# Altium PCB TestProject.PcbDoc
Units mm, origin at the board's own origin, x right, y up, seen from the top; angles counter-clockwise.
Board outline 50.8 x 54.8 mm, 2 copper layers (Top Layer, Bottom Layer); 19 components, 18 nets, 49 pads, 15 vias.
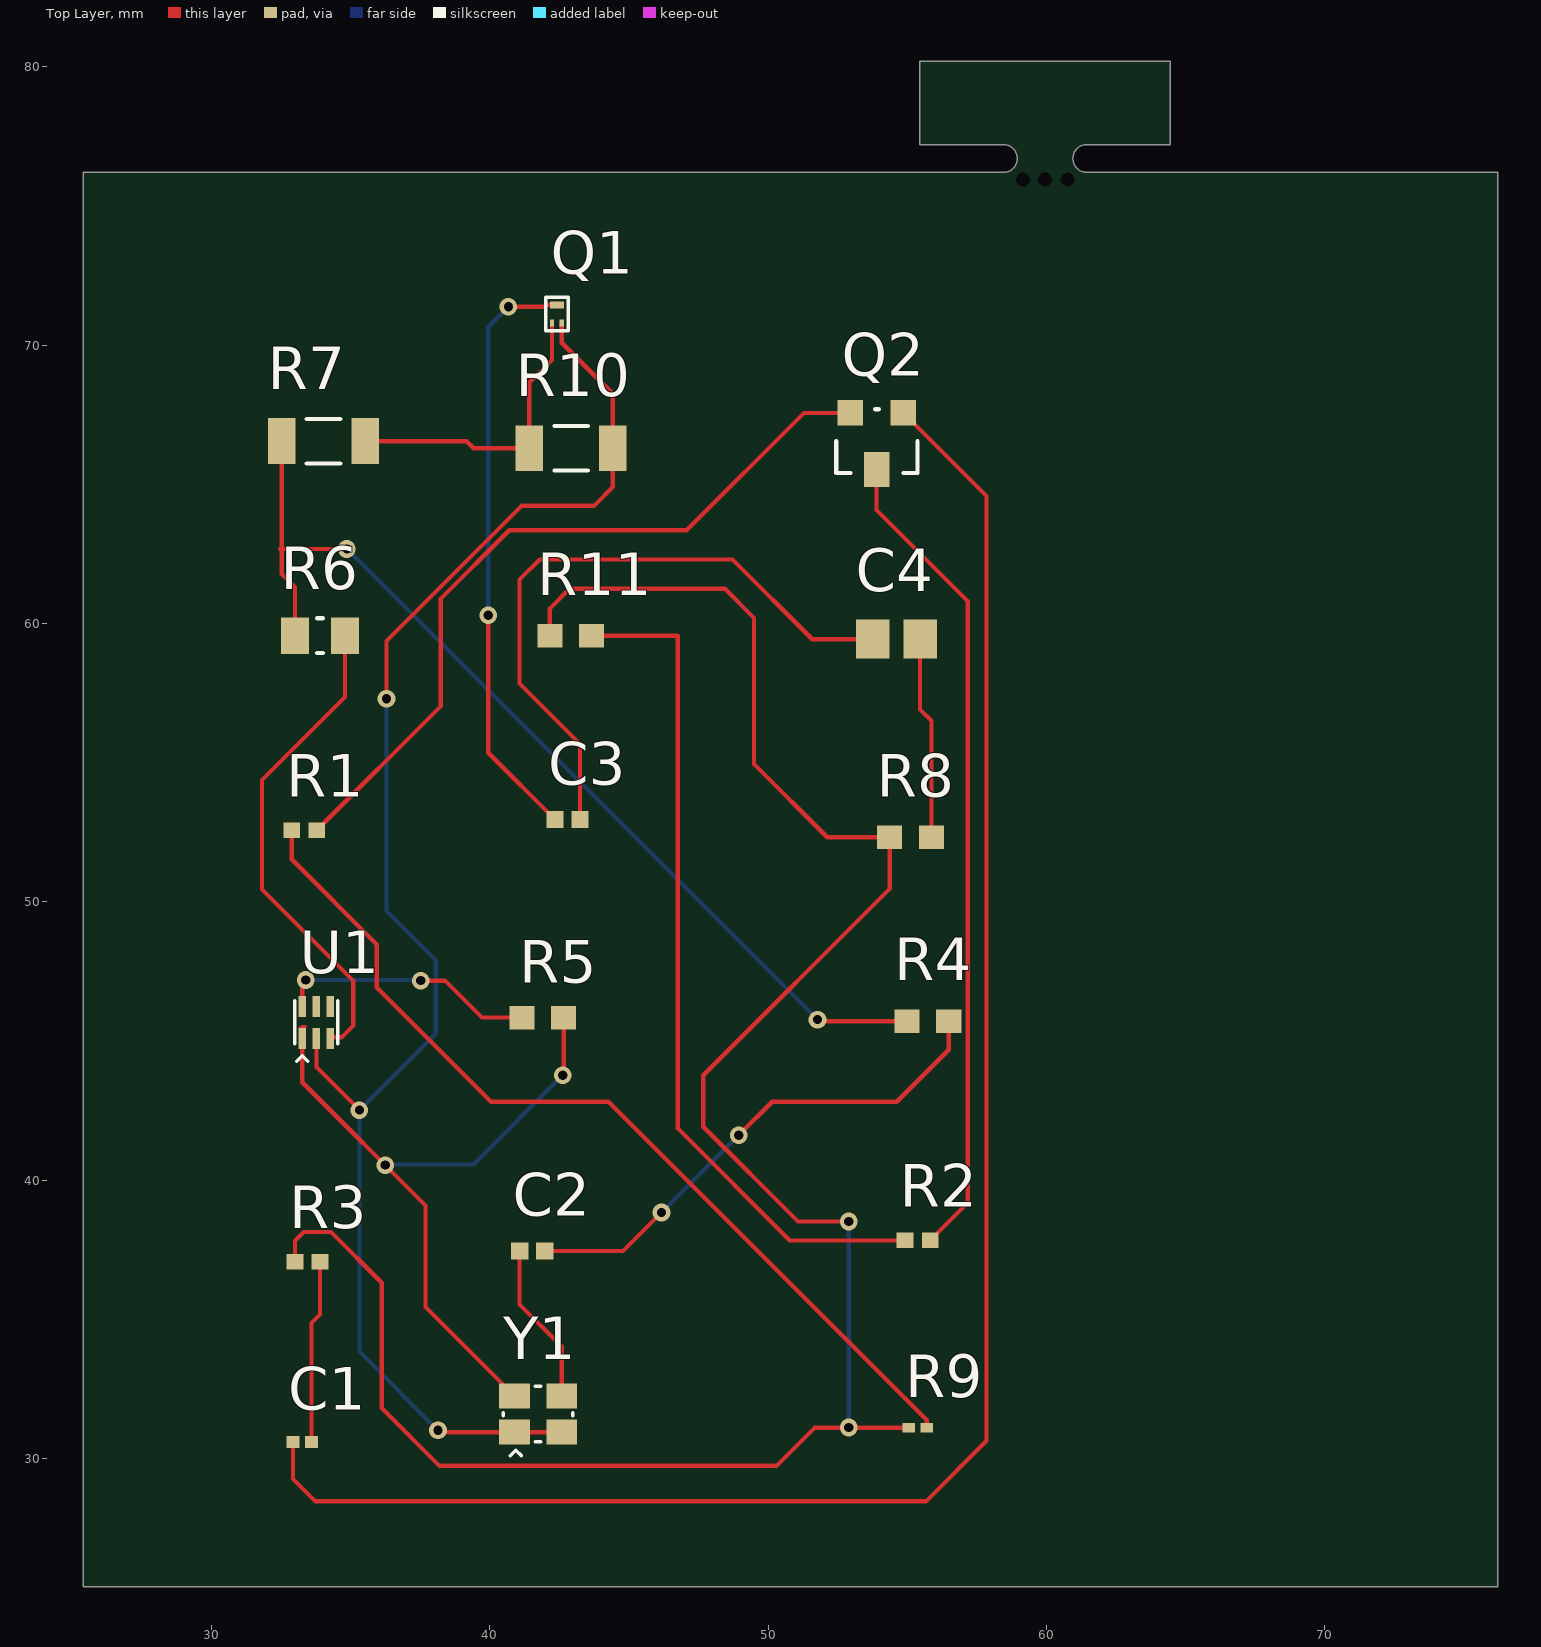
[diagram p0: Top Layer view]
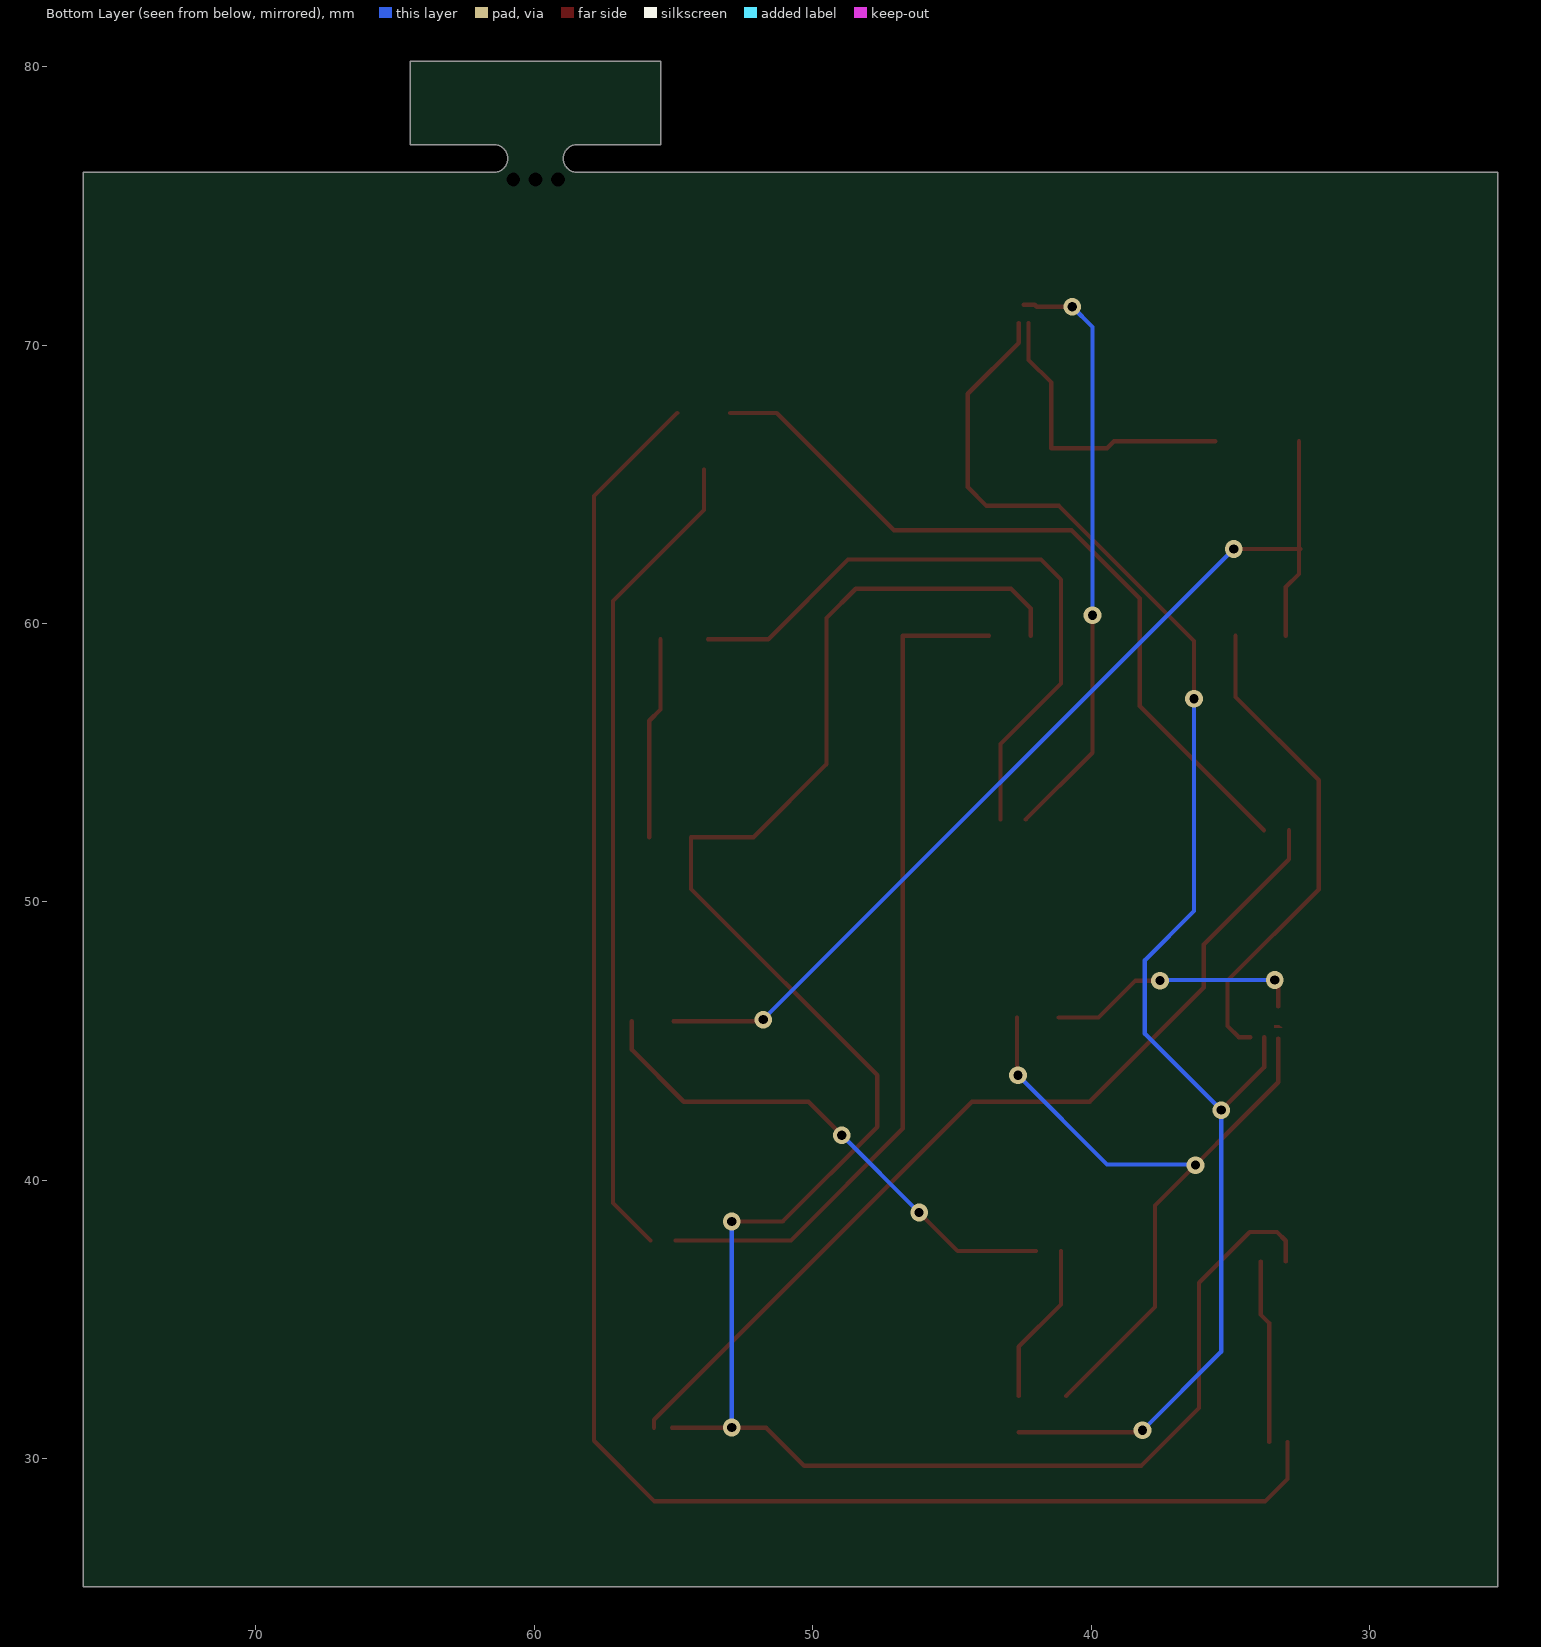
[diagram p1: Bottom Layer view, seen from below]

## Layer stack, top to bottom
Top Solder: solder mask 0.0102, Solder Resist, Dk 3.5
Top Layer: signal copper 0.0356
Dielectric 1: dielectric 0.32, FR-4, Dk 4.8
Bottom Layer: signal copper 0.0356
Bottom Solder: solder mask 0.0102, Solder Resist, Dk 3.5

## Board outline
25.4,25.4 25.4,76.2 58.45,76.2 ccw(c58.45,76.7) 58.45,77.2 55.45,77.2 55.45,80.2 64.45,80.2 64.45,77.2 61.45,77.2 ccw(c61.45,76.7) 61.45,76.2 76.2,76.2 76.2,25.4

## Design rules (kind name [scope] priority, off if disabled: settings)
AssemblyTestPointUsage [All] p1: valid=2
AssemblyTestpoint [All] p1: testpointundercomponent=TRUE minsize=1.016 maxsize=2.54 preferedsize=1.524 minholesize=0 maxholesize=1.016 preferedholesize=0.813 testpointgrid=2.54 usegrid=TRUE gridtolerance=0 allowsidetop=TRUE allowsidebottom=TRUE
Clearance LEDBoards [iscomponent] p1: gap=0.203 ignorepadtopadclearanceinfootprint=TRUE except(0.05: SMDPad-Hole)
Clearance Default [All] p2: gap=0.152 ignorepadtopadclearanceinfootprint=TRUE except(0.05: SMDPad-Region; 0.254: Fill-Fill Poly-Poly)
Clearance Power_Net [InNetClass('POWER')] p3: gap=0.203 ignorepadtopadclearanceinfootprint=TRUE
DiffPairsRouting Diff_Pairs_90_ohm [InDifferentialPairClass('DP90')] p1: maxlimit=0.203 minlimit=0.203 mostfreqgap=0.203 toplayer_minwidth=0.152 toplayer_maxwidth=0.152 toplayer_prefwidth=0.152 bottomlayer_minwidth=0.152 bottomlayer_maxwidth=0.152 bottomlayer_prefwidth=0.152 maxuncoupledlength=12.7
DiffPairsRouting Diff_Pairs_100_ohm [InDifferentialPairClass('DP100')] p2: maxlimit=0.178 minlimit=0.178 mostfreqgap=0.178 toplayer_minwidth=0.127 toplayer_maxwidth=0.127 toplayer_prefwidth=0.127 bottomlayer_minwidth=0.127 bottomlayer_maxwidth=0.127 bottomlayer_prefwidth=0.127 maxuncoupledlength=12.7
FabricationTestPointUsage [All] p1 off: valid=0 allowmultiple=FALSE
HoleSize [All] p1: absolutevalues=TRUE maxlimit=5 minlimit=0.025 maxpercent=80.000 minpercent=20.000
MatchedLengths "FLASH Matched Length" [InNetClass('FLASH')] p1: tolerance=5.08 checknetsindiffpair=FALSE checkdiffpairvsdiffpair=TRUE checkxsignals=TRUE checkothers=TRUE
MatchedLengths FSMC_Matched_Length_Group [InNetClass('FSMC_DA[0..15]')] p2: tolerance=2.54 checknetsindiffpair=FALSE checkdiffpairvsdiffpair=TRUE checkxsignals=TRUE checkothers=TRUE
MatchedLengths DP_100_match_within_pair [InDifferentialPairClass('DP100')] p3: tolerance=0.635 checknetsindiffpair=TRUE checkdiffpairvsdiffpair=FALSE checkxsignals=FALSE checkothers=FALSE
MatchedLengths DP_100_matched_length [InDifferentialPairClass('DP100')] p4: tolerance=0.635 checknetsindiffpair=FALSE checkdiffpairvsdiffpair=TRUE checkxsignals=TRUE checkothers=TRUE
MinimumSolderMaskSliver FinePitchIC [InComponentClass('FinePitchIC') vs InComponentClass('FinePitchIC')] p1: minsoldermaskwidth=0.076
MinimumSolderMaskSliver [All] p2: minsoldermaskwidth=0.1
NetAntennae [All] p1 off: netantennaetolerance=0
PlaneClearance [All] p1: clearance=0.305
PlaneConnect [All] p1: pad.planeconnectstyle=Relief pad.reliefexpansion=0.127 pad.reliefentries=4 pad.reliefconductorwidth=0.254 pad.reliefairgap=0.203 via.planeconnectstyle=Direct via.reliefexpansion=0.508 via.reliefentries=4 via.reliefconductorwidth=0.254 via.reliefairgap=0.254
PolygonConnect [InComponentClass('NoThermalRelief')] p1: thpad.connectstyle=Relief thpad.reliefconductorwidth=0.635 thpad.reliefentries=4 thpad.polygonreliefangle="90 Angle" thpad.airgapwidth=0.203 smdpad.connectstyle=Direct smdpad.reliefconductorwidth=0.254 smdpad.reliefentries=4 smdpad.polygonreliefangle="45 Angle" smdpad.airgapwidth=0.203 via.connectstyle=Direct via.reliefconductorwidth=0.254 via.reliefentries=4 via.polygonreliefangle="90 Angle" via.airgapwidth=0.254
PolygonConnect PolygonConnect_1 [All] p2: thpad.connectstyle=Relief thpad.reliefconductorwidth=0.635 thpad.reliefentries=4 thpad.polygonreliefangle="90 Angle" thpad.airgapwidth=0.203 smdpad.connectstyle=Relief smdpad.reliefconductorwidth=0.254 smdpad.reliefentries=4 smdpad.polygonreliefangle="45 Angle" smdpad.airgapwidth=0.203 via.connectstyle=Direct via.reliefconductorwidth=0.254 via.reliefentries=4 via.polygonreliefangle="90 Angle" via.airgapwidth=0.254
RoutingCorners [All] p1: cornerstyle=45-Degree minsetback=0.254 maxsetback=0.254
RoutingVias [All] p1: holewidth=0.33 width=0.61 viastyle="Through Hole" minholewidth=0.152 minwidth=0.457 maxholewidth=0.33 maxwidth=0.635
SilkToSilkClearance [All] p1: silktosilkclearance=0.013
SilkToSolderMaskClearance [IsPad] p1: minsilkscreentomaskgap=0.025 clearancetoexposedcopper=TRUE
SolderMaskExpansion [All] p1: expansion=0
Width Power_nets [InNetClass('Power')] p1: maxlimit=0.61 minlimit=0.254 preferedwidth=0.508
Width LEDtracks [InNetClass('LEDTrack')] p2: maxlimit=0.61 minlimit=0.254 preferedwidth=0.381
Width Default_Width [InNetClass('All Nets')] p3: maxlimit=0.254 minlimit=0.152 preferedwidth=0.203 checkconnectedcopper=TRUE
18 further rules are at their usual default settings.

## Components (designator, comment, footprint, x,y, rotation, side; value= is the part's Value field where it differs from the comment)
C1 "100pF" CAPC_0201(0603)_P33_N 33.274,30.607 r0 top
C2 "15pF" CAPC_0402(1005)_P55_N 41.529,37.465 r0 top
C3 "100pF" CAPC_0402(1005)_P55_N 42.799,52.959 r0 top
C4 "1.2pF" CAPC_0805(2012)_P95_N 54.61,59.436 r0 top
Q1 "CSD13381F4T" MOSFET3_TI_CSD13381F4T 42.418,71.12 r0 top
Q2 "MMBT3904-7-F" SOT-23 53.898,65.532 r0 top
R1 "10k2" RESC_0402(1005)_P4_N 33.343,52.578 r0 top
R2 "10k2" RESC_0402(1005)_P4_N 55.372,37.846 r0 top
R3 "10k2" RESC_0402(1005)_P4_N 33.459,37.084 r0 top
R4 "68k0" RESC_0603(1608)_P55_N 55.741,45.72 r0 top
R5 "0" RESC_0603(1608)_P55_N 41.91,45.847 r0 top
R6 "931k" RESC_0805(2012)_P6_N 33.909,59.563 r0 top
R7 "220k" RESC_1206(3216)_P6_N 34.036,66.548 r0 top
R8 "10R2" RESC_0603(1608)_P55_N 55.118,52.324 r0 top
R9 "10R2" RESC_0201(0603)_P28_N 55.372,31.115 r0 top
R10 "10k0" RESC_1206(3216)_P6_N 42.926,66.294 r0 top
R11 "360R" RESC_0603(1608)_P55_N 42.914,59.563 r0 top
U1 "TLV70028DSER" "TI DSE S-PWSON-N6" 33.775,45.675 r0 top
Y1 "SG-210STF 24.0000ML0" "Epson SG-210STF" 41.744,31.608 r0 top

## Footprints (in the part's own frame and the unit in brackets; to place one, negate y for a bottom-side part, rotate by r counter-clockwise, add the part's x,y. Pads: shape width x height; smd on the part's side, far side on the other; paste and mask are expansions set on the pad)
CAPC_0201(0603)_P33_N [mm]
  rect 0.46x0.42 smd: 1(-0.33,0) 2(0.33,0)
  body extent -0.75,-0.4 0.75,0.4, height 0.33
CAPC_0402(1005)_P55_N [mm]
  rect 0.62x0.62 smd: 1(-0.45,0) 2(0.45,0)
  body extent -0.95,-0.5 0.95,0.5, height 0.55
CAPC_0805(2012)_P95_N [mm]
  rect 1.2x1.4 smd: 1(-0.85,0) 2(0.85,0)
  body extent -1.7,-0.95 1.7,0.95, height 0.95
"Epson SG-210STF" [mm] "Crystal oscillator (SPXO)"
  rect 1.1x0.9 smd: 1(-0.85,-0.65) 2(0.85,-0.65) 3(0.85,0.65) 4(-0.85,0.65)
  silkscreen extent -1.25,-1.5 1.25,1, body extent -1.25,-1 1.25,1, height 0.8
MOSFET3_TI_CSD13381F4T [mm] "N-Channel 12V 2.1A (Ta) 500mW (Ta) Surface Mount 3-PICOSTAR"
  rect 0.15x0.25 smd paste+0 mask+0.05: 1(-0.175,-0.325) 2(0.175,-0.325)
  rect 0.5x0.25 smd paste+0 mask+0.05: 3(0,0.325)
  silkscreen extent -0.4,-0.6 0.4,0.6, body extent -0.3,-0.5 0.3,0.5, height 0.35
RESC_0201(0603)_P28_N [mm]
  rect 0.45x0.35 smd: 1(-0.325,0) 2(0.325,0)
  body extent -0.7,-0.35 0.7,0.35, height 0.28
RESC_0402(1005)_P4_N [mm]
  rect 0.6x0.55 smd: 1(-0.45,0) 2(0.45,0)
  body extent -0.9,-0.45 0.9,0.45, height 0.4
RESC_0603(1608)_P55_N [mm]
  rect 0.9x0.85 smd: 1(-0.75,0) 2(0.75,0)
  body extent -1.45,-0.7 1.45,0.7, height 0.55
RESC_0805(2012)_P6_N [mm]
  rect 1x1.3 smd: 1(-0.9,0) 2(0.9,0)
  silkscreen extent -0.1,-0.63 0.1,0.63, body extent -1.65,-0.9 1.65,0.9, height 0.6
RESC_1206(3216)_P6_N [mm]
  rect 1x1.65 smd: 1(-1.5,0) 2(1.5,0)
  silkscreen extent -0.6,-0.8 0.6,0.8, body extent -2.25,-1.1 2.25,1.1, height 0.6
SOT-23 [mil]
  rect 36x36 smd: 1(-36.98,80.01) 2(38.02,80.01)
  rect 36x50 smd: 3(0,-0.01)
  silkscreen extent -57,-5 58,85, body extent -59,-31 63,102, height 49
"TI DSE S-PWSON-N6" [mm] "TI WSON-6pin"
  rect 0.28x0.75 smd paste-0.015 mask+0.05: 1(-0.5,-0.575) 2(0,-0.575) 3(0.5,-0.575) 4(0.5,0.575) 5(0,0.575) 6(-0.5,0.575)
  Top Layer region: -0.64,-0.2 -0.54,-0.1 -0.36,-0.1 -0.36,-0.2
  silkscreen extent -0.77,-1.4 0.77,0.77, body extent -0.77,-0.77 0.77,0.77, height 0.8

## Part data
C1: library part 30030, Dielectric=NPO, Manufacturer=KEMET, Mfr Part Description="CAP CER 100pF ±5% 25V NPO 0201 (0603 Metric)", Mfr Part Number=C0201C101J3GACTU, Package_Case="0201 (0603 Metric)", Supplier Part Number=399-8925-1-ND, Temperature Range="-55C to +125C", Tolerance=±5%, Voltage_Rating=25V, Checked_Date="2018/04/12 14:14:25", Checked By=KristinPollock, ComponentLink1Description=Datasheet, ComponentLink1URL=https://search.kemet.com/component-edge/download/datasheet/C0201C101J3GACTU.pdf, ComponentLink2Description="Supplier Part Details", ComponentLink2URL=https://www.digikey.com/product-detail/en/kemet/C0201C101J3GACTU/399-8925-1-ND/3522442, Created_Date="2018/04/12 11:43:49", Created By=KristinPollock, ID=30030, LifeCycle=New, Part_Type=Capacitor, RoHS=Yes, Sub_Type=Ceramic, Supplier=Digi-Key, Updated_Date="2018/04/12 15:12:48", Updated By=KristinPollock
C2: library part 0402J150AX3, "Cap, Cer, 15pF, 5%, 25V, 0402, C0G", Alt_Mfr=Kemet, Alt_Part Number=C0402C150J3GACTU, Dielectric=C0G, Manufacturer=AVX, Mfr Part Number=04023A150JAT, Package_Case=0402, Temperature Range="-55C to +125C", Tolerance=5%, ValueSort=15, Voltage_Rating=25V, Checked_Date="2018-10-18 19:17:33", Checked By="DJH Script", Created_Date="2018-10-18 19:17:33", Created By="DJH Script", ID=0402J150AX3, LifeCycle=New, Part_Type=Capacitor, RoHS=Yes, Sub_Type=Ceramic
C3: library part 0402J101AX3, "Cap, Cer, 100pF, 5%, 25V, 0402, C0G", Alt_Mfr=Kemet, Alt_Part Number=C0402C101J3GACTU, Dielectric=C0G, Manufacturer=AVX, Mfr Part Number=04023A101JAT, Package_Case=0402, Temperature Range="-55C to +125C", Tolerance=5%, ValueSort=100, Voltage_Rating=25V, Checked_Date="2018-10-18 19:17:33", Checked By="DJH Script", Created_Date="2018-10-18 19:17:33", Created By="DJH Script", ID=0402J101AX3, LifeCycle=New, Part_Type=Capacitor, RoHS=Yes, Sub_Type=Ceramic
C4: library part 0805B129AX2, "Cap, Cer, 1.2pF, 0.1pF, 200V, 0805, C0G", Alt_Mfr=Kemet, Alt_Part Number=C0805C129B2GACTU, Dielectric=C0G, Manufacturer=AVX, Mfr Part Number=08052A1R2BAT, Package_Case=0805, Temperature Range="-55C to +125C", Tolerance=0.1pF, ValueSort=1.2, Voltage_Rating=200V, Checked_Date="2018-10-18 19:17:43", Checked By="DJH Script", Created_Date="2018-10-18 19:17:43", Created By="DJH Script", ID=0805B129AX2, LifeCycle=New, Part_Type=Capacitor, RoHS=Yes, Sub_Type=Ceramic
Q1: library part 30004, "MOSFET N-CH 12V 2.1A 3PICOSTAR", Current_Rating="2.1A (Ta)", Manufacturer="Texas Instruments", Package_Case=3-XFDFN, Supplier Part Number=296-37779-1-ND, Temperature Range="-55C to +150C (TJ)", Voltage_Rating=12V, Checked_Date="2018/03/05 11:42:27", Checked By="Kristin Pollock", Checked date=2017-09-28, ComponentLink1Description=Datasheet, ComponentLink1URL=http://www.ti.com/lit/ds/symlink/csd13381f4.pdf, ComponentLink2Description="Supplier Part Details", ComponentLink2URL=https://www.digikey.com/product-detail/en/CSD13381F4T/296-37779-1-ND, Created_Date="2018/03/05 11:40:06", Created By="Kristin Pollock", Created date=2017-07-20, ID=30004, LifeCycle=New, MFG=TI, Mfr Part Description="MOSFET N-CH 12V 2.1A 3PICOSTAR", Mfr Part Number=CSD13381F4T, MPN=CSD13381F4T, Part_Type=Discrete, RoHS=Yes, Sub_Type="FET N-CH", Supplier=Digi-Key, Supplier 1=Digi-Key, Supplier Part Number 1=296-37779-1-ND, Updated_Date="2018/03/05 11:53:56", Updated By="Kristin Pollock"
Q2: library part 30027, "NPN General Purpose Amplifier", Current_Rating=200mA, Manufacturer="Diodes Incorporated", Mfr Part Description="TRANS NPN 40V 0.2A SMD SOT23-3", Package_Case="TO-236-3, SC-59, SOT-23-3", Supplier Part Number=MMBT3904-FDICT-ND, Temperature Range="-55C to +150C (TJ)", Voltage_Rating=40V, Checked_Date="2018/04/19 15:36:23", Checked By=DaveHough, ComponentLink1Description=Datasheet, ComponentLink1URL=https://media.digikey.com/pdf/Data%20Sheets/Diodes%20PDFs/MMBT3904.pdf, ComponentLink2Description="Supplier Part Details", ComponentLink2URL=https://www.digikey.com/products/en?keywords=MMBT3904-FDICT-ND, Created_Date="2018/04/10 10:51:11", Created By=DaveHough, ID=30027, LifeCycle=New, MFG="Diodes Inc", Mfr Part Number=MMBT3904-7-F, MPN=MMBT3904-7-F, MTG=SMT, Part_Type=Discrete, RoHS=Yes, SPN=MMBT3904-FDICT-ND, SPR=Digikey, Sub_Type="BJT NPN", Supplier=Digi-Key, Updated_Date="2018/04/19 15:36:29", Updated By=DaveHough
R1 R2 R3: library part 0402E1022XBX, "Res 0402 1% 10k2 1/16W", Alt_Mfr=Yageo, Alt_Mfr2="Vishay Dale", Alt_Part Number=RC0402FR-0710K2L, Alt_Part Number2=CRCW040210K2FKED, Manufacturer=Panasonic, Mfr Part Number=ERJ2RKF1022X, Package_Case=0402, Power_Rating=1/16W, Temperature Range="-55C to +125C", Tolerance=1%, ValueSort=10200, Voltage_Rating=50V, Checked_Date="2018-10-18 18:51:45", Checked By="DJH Script", Created_Date="2018-10-18 18:51:45", Created By="DJH Script", ID=0402E1022XBX, LifeCycle=New, Part_Type=chipResistor, RoHS=Yes
R4: library part 0603E6802XCX, "Res 0603 1% 68k0 1/10W", Alt_Mfr=Yageo, Alt_Mfr2="Vishay Dale", Alt_Part Number=RC0603FR-0768KL, Alt_Part Number2=CRCW060368K0FKEA, Manufacturer=Panasonic, Mfr Part Number=ERJ3EKF6802V, Package_Case=0603, Power_Rating=1/10W, Temperature Range="-55C to +125C", Tolerance=1%, ValueSort=68000, Voltage_Rating=75V, Checked_Date="2018-10-18 18:51:45", Checked By="DJH Script", Created_Date="2018-10-18 18:51:45", Created By="DJH Script", ID=0603E6802XCX, LifeCycle=New, Part_Type=chipResistor, RoHS=Yes
R5: library part 30019, Manufacturer=Yageo, Mfr Part Description="RES 0 Ohm Jumper 1/10W 0603 (1608 Metric)", Mfr Part Number=RC0603JR-070RL, Package_Case="0603 (1608 Metric)", Power_Rating="0.1W, 1/10W", Supplier Part Number=311-0.0GRCT-ND, Temperature Range="-55C to +155C", Tolerance=Jumper, Checked_Date="2018/03/08 06:36:08", Checked By="Kristin Pollock", ComponentLink1Description=Datasheet, ComponentLink1URL=http://www.yageo.com/documents/recent/PYu-RC_Group_51_RoHS_L_8.pdf, ComponentLink2Description="Supplier Part Details", ComponentLink2URL=https://www.digikey.com/products/en?x=0&y=0&lang=en&site=us&keywords=311-0.0GRCT-ND, Created_Date="2018/03/08 06:30:19", Created By="Kristin Pollock", ID=30019, LifeCycle=New, Part_Type=Resistor, RoHS=Yes, Supplier=Digi-Key, Updated_Date="2018/04/12 16:03:06", Updated By=KristinPollock
R6: library part 0805E9313XDX, "Res 0805 1% 931k 1/8W", Alt_Mfr=Yageo, Alt_Mfr2="Vishay Dale", Alt_Part Number=RC0805FR-07931KL, Alt_Part Number2=CRCW0805931KFKEA, Manufacturer=Panasonic, Mfr Part Number=ERJ6ENF9313V, Package_Case=0805, Power_Rating=1/8W, Temperature Range="-55C to +125C", Tolerance=1%, ValueSort=931000, Voltage_Rating=100V, Checked_Date="2018-10-18 18:51:45", Checked By="DJH Script", Created_Date="2018-10-18 18:51:45", Created By="DJH Script", ID=0805E9313XDX, LifeCycle=New, Part_Type=chipResistor, RoHS=Yes
R7: library part 1206E2203XEX, "Res 1206 1% 220k 1/4W", Alt_Mfr=Yageo, Alt_Mfr2="Vishay Dale", Alt_Part Number=RC1206FR-07220KL, Alt_Part Number2=CRCW1206220KFKEA, Manufacturer=Panasonic, Mfr Part Number=ERJ8ENF2203V, Package_Case=1206, Power_Rating=1/4W, Temperature Range="-55C to +125C", Tolerance=1%, ValueSort=220000, Voltage_Rating=200V, Checked_Date="2018-10-18 18:51:45", Checked By="DJH Script", Created_Date="2018-10-18 18:51:45", Created By="DJH Script", ID=1206E2203XEX, LifeCycle=New, Part_Type=chipResistor, RoHS=Yes
R8: library part 0603E1029XCX, "Res 0603 1% 10R2 1/10W", Alt_Mfr=Yageo, Alt_Mfr2="Vishay Dale", Alt_Part Number=RC0603FR-0710R2L, Alt_Part Number2=CRCW060310R2FKEA, Manufacturer=Panasonic, Mfr Part Number=ERJ3EKF10R2V, Package_Case=0603, Power_Rating=1/10W, Temperature Range="-55C to +125C", Tolerance=1%, ValueSort=10.2, Voltage_Rating=75V, Checked_Date="2018-10-18 18:51:45", Checked By="DJH Script", Created_Date="2018-10-18 18:51:45", Created By="DJH Script", ID=0603E1029XCX, LifeCycle=New, Part_Type=chipResistor, RoHS=Yes
R9: library part 0201E1029XAX, "Res 0201 1% 10R2 1/20W", Alt_Mfr=Yageo, Alt_Mfr2="Vishay Dale", Alt_Part Number=RC0201FR-0710R2L, Alt_Part Number2=CRCW020110R2FKED, Manufacturer=Panasonic, Mfr Part Number=ERJ1GNF10R2C, Package_Case=0201, Power_Rating=1/20W, Temperature Range="-55C to +125C", Tolerance=1%, ValueSort=10.2, Voltage_Rating=25V, Checked_Date="2018-10-18 18:51:45", Checked By="DJH Script", Created_Date="2018-10-18 18:51:45", Created By="DJH Script", ID=0201E1029XAX, LifeCycle=New, Part_Type=chipResistor, RoHS=Yes
R10: library part 1206E1002XEX, "Res 1206 1% 10k0 1/4W", Alt_Mfr=Yageo, Alt_Mfr2="Vishay Dale", Alt_Part Number=RC1206FR-0710KL, Alt_Part Number2=CRCW120610K0FKEA, Manufacturer=Panasonic, Mfr Part Number=ERJ8ENF1002V, Package_Case=1206, Power_Rating=1/4W, Temperature Range="-55C to +125C", Tolerance=1%, ValueSort=10000, Voltage_Rating=200V, Checked_Date="2018-10-18 18:51:45", Checked By="DJH Script", Created_Date="2018-10-18 18:51:45", Created By="DJH Script", ID=1206E1002XEX, LifeCycle=New, Part_Type=chipResistor, RoHS=Yes
R11: library part 0603E3600XCX, "Res 0603 1% 360R 1/10W", Alt_Mfr=Yageo, Alt_Mfr2="Vishay Dale", Alt_Part Number=RC0603FR-07360RL, Alt_Part Number2=CRCW0603360RFKEA, Manufacturer=Panasonic, Mfr Part Number=ERJ3EKF3600V, Package_Case=0603, Power_Rating=1/10W, Temperature Range="-55C to +125C", Tolerance=1%, ValueSort=360, Voltage_Rating=75V, Checked_Date="2018-10-18 18:51:45", Checked By="DJH Script", Created_Date="2018-10-18 18:51:45", Created By="DJH Script", ID=0603E3600XCX, LifeCycle=New, Part_Type=chipResistor, RoHS=Yes
U1: library part 30016, "IC REG LDO 2.8V 0.2A 6WSON", Manufacturer="Texas Instruments", Mfr Part Description="IC REG LINEAR 2.8V 200MA 6WSON", Package_Case=6-WFDFN, Supplier Part Number=296-25291-1-ND, Temperature Range="-40C to +125C", Checked_Date="2018/03/05 11:52:06", Checked By="Kristin Pollock", Checked date=2017-09-26, ComponentLink1Description=Datasheet, ComponentLink1URL=http://www.ti.com/lit/ds/slvsa00e/slvsa00e.pdf, ComponentLink2Description="Supplier Part Details", ComponentLink2URL=https://www.digikey.com/product-detail/en/TLV70028DSER/296-25291-1-ND, Created_Date="2018/03/05 11:40:06", Created By="Kristin Pollock", Created date=2017-08-30, ID=30016, LifeCycle=New, MFG=TI, Mfr Part Number=TLV70028DSER, MPN=TLV70028DSER, Part_Type=IC, RoHS=Yes, Sub_Type="REG LINEAR", Supplier=Digi-Key, Supplier 1=Digi-Key, Supplier Part Number 1=296-25291-1-ND, Updated_Date="2018/03/05 11:52:54", Updated By="Kristin Pollock"
Y1: library part 30010, "OSC XO 24.000MHZ CMOS SMD", Current_Rating=2.2mA, Manufacturer=EPSON, Package_Case="4-SMD, No Lead", Supplier Part Number=SER4078CT-ND, Temperature Range="-40C to +85C", Voltage_Rating="1.6 V ~ 3.6 V", Checked_Date="2018/03/05 11:44:37", Checked By="Kristin Pollock", Checked date=2017-09-26, ComponentLink1Description=Datasheet, ComponentLink1URL=https://support.epson.biz/td/api/doc_check.php?dl=brief_SG-210STF_en.pdf, ComponentLink2Description="Supplier Part Details", ComponentLink2URL=https://www.digikey.com/product-detail/en/SG-210STF%2024.0000ML0/SER4078CT-ND, Created_Date="2018/03/05 11:40:06", Created By="Kristin Pollock", Created date=2017-08-13, ID=30010, LifeCycle=New, MFG=Abracon, Mfr Part Description="OSC XO 24.000MHZ CMOS SMD", Mfr Part Number="SG-210STF 24.0000ML0", MPN="SG-210STF 24.0000ML0", Part_Type=OSC, RoHS=Yes, Supplier=Digi-Key, Supplier 1=Digi-Key, Supplier Part Number 1=SER4078CT-ND, Updated_Date="2018/03/05 11:53:19", Updated By="Kristin Pollock"

## Free pads (board coordinates)
  oval 0x0.2 hole 0.5 unplated: 6(59.95,75.95) 7(59.15,75.95) 8(60.75,75.95)

## Via types
v1: diameter 0.635, hole 0.33, Top Layer to Bottom Layer, 15 vias

## Nets (pads, with @x,y where several pads share a name; then routed paths per layer and width w, separated by ;. In a path a pad name is that pad's centre, name@x,y a point inside that pad or via, vN(x,y) a via of type N, cw(c..) or ccw(c..) an arc to the next point about the centre after c; other vN are vias at no path point)
GND: Q1.2 R10.2 U1.2 Y1.1 Y1.2 | length 56.2
  Top Layer w0.152: U1.2@33.782,45.145 33.782,44.068 v1(35.325,42.525) ; v1(36.3,57.3) 36.3,59.375 41.15,64.225 43.75,64.225 44.426,64.901 R10.2 44.426,68.249 42.593,70.082 Q1.2 ; v1(38.15,31.025) 38.217,30.958 Y1.1 Y1.2
  Bottom Layer w0.152: v1(36.3,57.3) 36.3,49.675 38.071,47.904 38.071,45.271 v1(35.325,42.525) 35.325,33.85 v1(38.15,31.025)
NetC1_1: C1.1 Q2.2 | length 65.6
  Top Layer w0.152: C1.1 32.944,29.281 33.75,28.475 55.675,28.475 57.85,30.65 57.85,64.578 Q2.2
NetC1_2: C1.2 R3.2 | length 6.6
  Top Layer w0.152: C1.2 33.604,34.879 33.909,35.184 R3.2
NetC2_1: C2.1 Y1.3 | length 5.8
  Top Layer w0.152: C2.1 41.079,35.546 42.594,34.031 Y1.3
NetC2_2: C2.2 R4.2 | length 18.5
  Top Layer w0.152: C2.2 44.79,37.465 v1(46.175,38.85) ; v1(48.95,41.625) 50.15,42.825 54.625,42.825 56.491,44.691 R4.2
  Bottom Layer w0.152: v1(46.175,38.85) v1(48.95,41.625)
NetC3_1: C3.1 Q1.3 | length 21.5
  Top Layer w0.152: v1(39.95,60.3) 39.95,55.358 C3.1 ; v1(40.675,71.375) 41.95,71.375 42.02,71.445 Q1.3
  Bottom Layer w0.152: v1(39.95,60.3) 39.95,70.65 v1(40.675,71.375)
NetC3_2: C3.2 C4.1 | length 23.7
  Top Layer w0.152: C3.2 43.249,55.676 41.075,57.85 41.075,61.575 41.8,62.3 48.725,62.3 51.589,59.436 C4.1
NetC4_2: C4.2 R8.2 | length 7.3
  Top Layer w0.152: C4.2 55.46,56.915 55.868,56.507 R8.2
NetQ1_1: Q1.1 R7.2 R10.1 | length 10.8
  Top Layer w0.152: R7.2 39.177,66.548 39.431,66.294 R10.1 41.426,68.651 42.243,69.468 Q1.1
NetQ2_1: Q2.1 R1.2 | length 27.6
  Top Layer w0.152: R1.2 38.25,57.035 38.25,60.894 40.706,63.35 47.075,63.35 51.289,67.564 Q2.1
NetQ2_3: Q2.3 R2.2 | length 29.6
  Top Layer w0.152: Q2.3 53.898,64.077 57.17,60.805 57.17,39.194 R2.2
NetR1_1: R1.1 R9.2 | length 33.4
  Top Layer w0.152: R1.1 32.893,51.532 35.95,48.475 35.95,46.925 40.05,42.825 44.275,42.825 55.697,31.403 R9.2
NetR2_1: R2.1 R11.2 | length 30.6
  Top Layer w0.152: R11.2 46.762,59.563 46.762,41.863 50.779,37.846 R2.1
NetR3_1: R3.1 R8.1 R9.1 R11.1 | length 77.1
  Top Layer w0.152: R3.1 33.009,37.834 33.325,38.15 34.3,38.15 36.125,36.325 36.125,31.825 38.2,29.75 50.3,29.75 51.665,31.115 v1@52.89,31.115 ; R11.1 42.164,60.539 42.875,61.25 48.45,61.25 49.5,60.2 49.5,54.95 52.126,52.324 R8.1 54.368,50.468 47.675,43.775 47.675,41.925 51.075,38.525 v1(52.9,38.525) ; v1@52.875,31.1 v1@52.89,31.115 ; v1(52.9,31.125) v1@52.89,31.115 ; R9.1 v1@52.89,31.115
  Bottom Layer w0.152: v1(52.9,31.125) v1(52.9,38.525)
NetR4_1: R4.1 R6.1 R7.1 | length 36.7
  Top Layer w0.152: 32.475,62.675 32.536,62.675 ; R7.1 32.536,62.675 ; R6.1 33.009,61.308 32.536,61.781 32.536,62.675 ; v1(34.875,62.675) 32.536,62.675 ; v1(51.775,45.775) 51.83,45.72 R4.1
  Bottom Layer w0.152: v1(34.875,62.675) v1(51.775,45.775)
NetR5_1: R5.1 U1.6 | length 9.3
  Top Layer w0.152: U1.6 33.275,47.075 v1(33.4,47.2) ; v1(37.525,47.175) 38.4,47.175 39.728,45.847 R5.1
  Bottom Layer w0.152: v1(33.4,47.2) 37.5,47.2 v1(37.525,47.175)
NetR6_2: R6.2 U1.3 | length 17.6
  Top Layer w0.152: U1.3@34.282,45.145 34.695,45.145 35.1,45.55 35.1,47.175 31.825,50.45 31.825,54.375 34.809,57.359 R6.2
P3V3: R5.2 U1.1 Y1.4 | length 25.8
  Top Layer w0.152: U1.1 33.275,43.525 37.7,39.1 37.7,35.452 Y1.4 ; v1(42.625,43.775) 42.66,43.81 R5.2
  Bottom Layer w0.152: v1(36.25,40.55) 36.275,40.575 39.425,40.575 v1(42.625,43.775)
pads on no net: U1.4 U1.5

## Silkscreen, mask and mechanical layers (free items; w line width, h text height)
Mechanical 3:
  lines w0.15: 55.45,77.2 55.45,80.2 64.45,80.2 64.45,77.2 61.45,77.2 ccw(c61.45,76.7) 61.45,76.2 76.2,76.2 76.2,25.4 25.4,25.4 25.4,76.2 58.45,76.2 ccw(c58.45,76.7) 58.45,77.2 55.45,77.2 ; 55.45,77.2 55.45,77.2

## Text inside footprints (layer, text, board x,y; h text height)
C1: Mechanical 18 "Created by: Kristin Pollock" at 32.674,30.807 h0.05; Mechanical 18 "Created date: 2018-04-12" at 32.674,30.707 h0.05; Mechanical 18 "Checked by: Kristin Pollock" at 32.675,30.607 h0.05; Mechanical 18 "Checked date: 2018-04-12" at 32.674,30.507 h0.05 r0.05; Mechanical 18 "Modified date 2018-04-18" at 32.674,30.307 h0.05; Mechanical 18 "Modified by David Hough" at 32.674,30.407 h0.05
C2: Mechanical 18 "Modified by David Hough" at 40.629,36.765 h0.05; Mechanical 18 "Modified date 2018-04-18" at 40.629,36.565 h0.05; Mechanical 18 "Checked date: 2018-04-12" at 40.629,37.015 h0.05; Mechanical 18 "Checked by: Kristin Pollock" at 40.629,37.265 h0.05; Mechanical 18 "Created date: 2018-04-12" at 40.629,37.515 h0.05; Mechanical 18 "Created by: Kristin Pollock" at 40.629,37.765 h0.05
C3: Mechanical 18 "Modified by David Hough" at 41.899,52.259 h0.05; Mechanical 18 "Modified date 2018-04-18" at 41.899,52.059 h0.05; Mechanical 18 "Checked date: 2018-04-12" at 41.899,52.509 h0.05; Mechanical 18 "Checked by: Kristin Pollock" at 41.899,52.759 h0.05; Mechanical 18 "Created date: 2018-04-12" at 41.899,53.009 h0.05; Mechanical 18 "Created by: Kristin Pollock" at 41.899,53.259 h0.05
Q1: Mechanical 18 "Created by AH" at 42.164,71.374 h0.05; Mechanical 18 "Created date 2017-09-05" at 42.164,71.247 h0.05; Mechanical 18 "Checked by" at 42.164,71.12 h0.05; Mechanical 18 "Checked date" at 42.164,70.993 h0.05; Mechanical 18 "Modified date 2018-04-18" at 42.164,70.739 h0.05; Mechanical 18 "Modified by David Hough" at 42.164,70.866 h0.05
R1: Mechanical 18 "Modified by David Hough" at 32.743,52.378 h0.05; Mechanical 18 "Modified date 2018-04-18" at 32.743,52.278 h0.05; Mechanical 18 "Checked date: 2018-04-12" at 32.743,52.478 h0.05 r0.05; Mechanical 18 "Checked by: Kristin Pollock" at 32.744,52.578 h0.05; Mechanical 18 "Created date: 2018-04-12" at 32.743,52.678 h0.05; Mechanical 18 "Created by: Kristin Pollock" at 32.743,52.778 h0.05
R2: Mechanical 18 "Modified by David Hough" at 54.772,37.646 h0.05; Mechanical 18 "Modified date 2018-04-18" at 54.772,37.546 h0.05; Mechanical 18 "Checked date: 2018-04-12" at 54.772,37.746 h0.05 r0.05; Mechanical 18 "Checked by: Kristin Pollock" at 54.773,37.846 h0.05; Mechanical 18 "Created date: 2018-04-12" at 54.772,37.946 h0.05; Mechanical 18 "Created by: Kristin Pollock" at 54.772,38.046 h0.05
R3: Mechanical 18 "Modified by David Hough" at 32.859,36.884 h0.05; Mechanical 18 "Modified date 2018-04-18" at 32.859,36.784 h0.05; Mechanical 18 "Checked date: 2018-04-12" at 32.859,36.984 h0.05 r0.05; Mechanical 18 "Checked by: Kristin Pollock" at 32.86,37.084 h0.05; Mechanical 18 "Created date: 2018-04-12" at 32.859,37.184 h0.05; Mechanical 18 "Created by: Kristin Pollock" at 32.859,37.284 h0.05
R4: Mechanical 18 "Modified by David Hough" at 55.141,45.52 h0.05; Mechanical 18 "Modified date 2018-04-18" at 55.141,45.42 h0.05; Mechanical 18 "Checked date: 2018-04-12" at 55.141,45.62 h0.05 r0.05; Mechanical 18 "Checked by: Kristin Pollock" at 55.142,45.72 h0.05; Mechanical 18 "Created date: 2018-04-12" at 55.141,45.82 h0.05; Mechanical 18 "Created by: Kristin Pollock" at 55.141,45.92 h0.05
R5: Mechanical 18 "Modified by David Hough" at 41.31,45.647 h0.05; Mechanical 18 "Modified date 2018-04-18" at 41.31,45.547 h0.05; Mechanical 18 "Checked date: 2018-04-12" at 41.31,45.747 h0.05 r0.05; Mechanical 18 "Checked by: Kristin Pollock" at 41.311,45.847 h0.05; Mechanical 18 "Created date: 2018-04-12" at 41.31,45.947 h0.05; Mechanical 18 "Created by: Kristin Pollock" at 41.31,46.047 h0.05
R6: Mechanical 18 "Created by: Kristin Pollock" at 33.309,59.763 h0.05; Mechanical 18 "Created date: 2018-04-12" at 33.309,59.663 h0.05; Mechanical 18 "Checked by: Kristin Pollock" at 33.309,59.563 h0.05; Mechanical 18 "Checked date: 2018-04-12" at 33.309,59.463 h0.05 r0.05; Mechanical 18 "Modified by David Hough" at 33.309,59.363 h0.05; Mechanical 18 "Modified date 2018-04-18" at 33.309,59.263 h0.05
R7: Mechanical 18 "Modified by David Hough" at 33.436,66.348 h0.05; Mechanical 18 "Modified date 2018-04-18" at 33.436,66.248 h0.05; Mechanical 18 "Checked date: 2018-04-12" at 33.436,66.448 h0.05 r0.05; Mechanical 18 "Checked by: Kristin Pollock" at 33.436,66.548 h0.05; Mechanical 18 "Created date: 2018-04-12" at 33.436,66.648 h0.05; Mechanical 18 "Created by: Kristin Pollock" at 33.436,66.748 h0.05
R8: Mechanical 18 "Modified by David Hough" at 54.518,52.124 h0.05; Mechanical 18 "Modified date 2018-04-18" at 54.518,52.024 h0.05; Mechanical 18 "Checked date: 2018-04-12" at 54.518,52.224 h0.05 r0.05; Mechanical 18 "Checked by: Kristin Pollock" at 54.519,52.324 h0.05; Mechanical 18 "Created date: 2018-04-12" at 54.518,52.424 h0.05; Mechanical 18 "Created by: Kristin Pollock" at 54.518,52.524 h0.05
R9: Mechanical 18 "Modified by David Hough" at 54.772,30.74 h0.05; Mechanical 18 "Modified date 2018-04-18" at 54.772,30.59 h0.05; Mechanical 18 "Checked date: 2018-04-12" at 54.772,30.89 h0.05; Mechanical 18 "Checked by: Kristin Pollock" at 54.772,31.04 h0.05; Mechanical 18 "Created date: 2018-04-12" at 54.772,31.215 h0.05; Mechanical 18 "Created by: Kristin Pollock" at 54.772,31.365 h0.05
R10: Mechanical 18 "Modified by David Hough" at 42.326,66.094 h0.05; Mechanical 18 "Modified date 2018-04-18" at 42.326,65.994 h0.05; Mechanical 18 "Checked date: 2018-04-12" at 42.326,66.194 h0.05 r0.05; Mechanical 18 "Checked by: Kristin Pollock" at 42.326,66.294 h0.05; Mechanical 18 "Created date: 2018-04-12" at 42.326,66.394 h0.05; Mechanical 18 "Created by: Kristin Pollock" at 42.326,66.494 h0.05
R11: Mechanical 18 "Modified by David Hough" at 42.314,59.363 h0.05; Mechanical 18 "Modified date 2018-04-18" at 42.314,59.263 h0.05; Mechanical 18 "Checked date: 2018-04-12" at 42.314,59.463 h0.05 r0.05; Mechanical 18 "Checked by: Kristin Pollock" at 42.315,59.563 h0.05; Mechanical 18 "Created date: 2018-04-12" at 42.314,59.663 h0.05; Mechanical 18 "Created by: Kristin Pollock" at 42.314,59.763 h0.05
U1: Mechanical 18 "Checked date 2017-09-26" at 33.14,45.421 h0.05; Mechanical 18 "Checked by Kristin Pollock" at 33.14,45.548 h0.05; Mechanical 18 "Created date 2017-09-05" at 33.14,45.675 h0.05; Mechanical 18 "Created by AH" at 33.14,45.802 h0.05; Mechanical 18 "Modified date 2018-04-18" at 33.14,45.167 h0.05; Mechanical 18 "Modified by David Hough" at 33.14,45.294 h0.05
Y1: Mechanical 18 "Checked date 2017-09-26" at 40.544,31.208 h0.1; Mechanical 18 "Checked by Kristin Pollock" at 40.544,31.408 h0.1; Mechanical 18 "Created date 2017-08-21" at 40.6,31.616 h0.1; Mechanical 18 "Created by Lowell Stewart" at 40.544,31.808 h0.1; Mechanical 18 "Modifed by Kristin Pollock" at 40.569,31.058 h0.1; Mechanical 18 "Modified date 2017-09-26" at 40.569,30.858 h0.1; Mechanical 18 "Modified date 2018-04-18" at 40.601,30.465 h0.1; Mechanical 18 "Modified by David Hough" at 40.601,30.665 h0.1